# Altium PCB ANT-F-2.4G-FR4.PcbDoc (part 1 of 2)
Units mil, origin at the board's own origin, x right, y up, seen from the top; angles counter-clockwise.
Board outline 8878.9 x 2863.35 mil, 2 copper layers (Top Layer, Bottom Layer); 99 components, 48 nets, 825 pads, 1430 vias.
Unrouted connection lines stored in the file: 96.
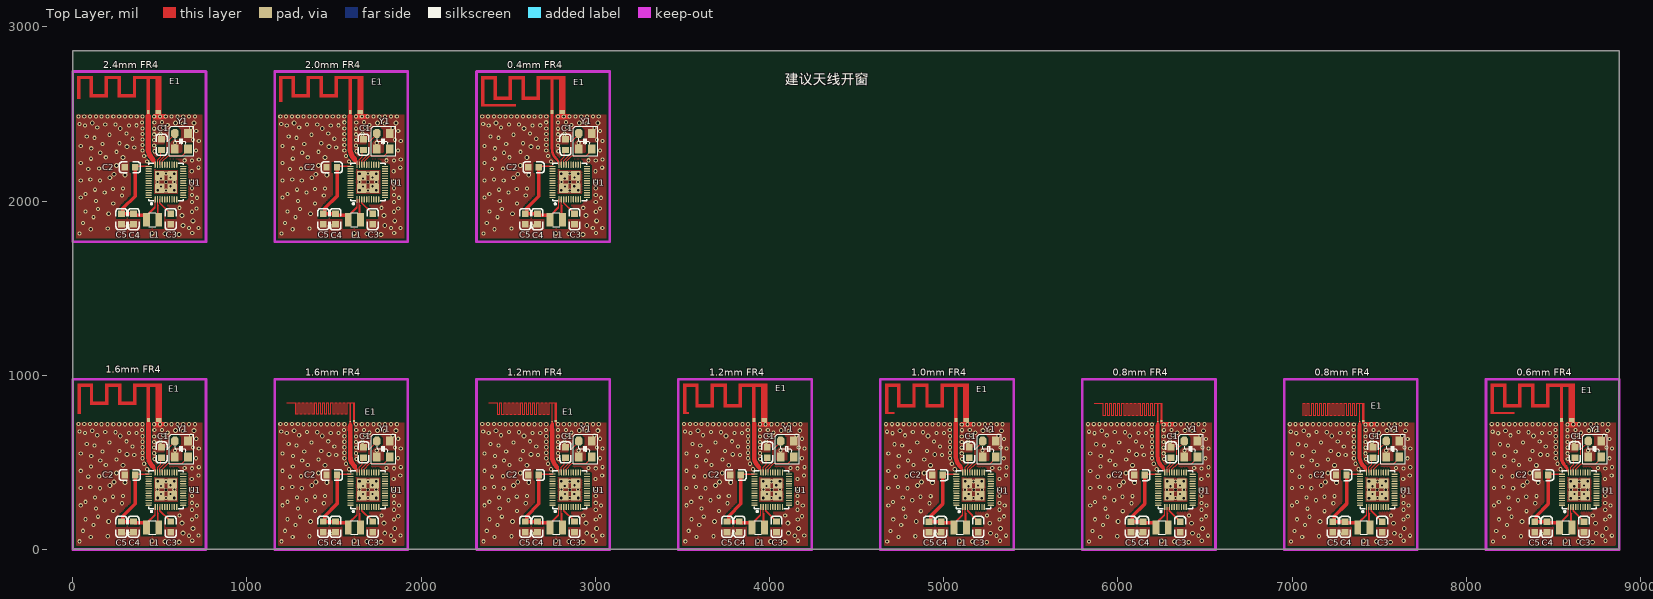
[diagram p0: Top Layer view]
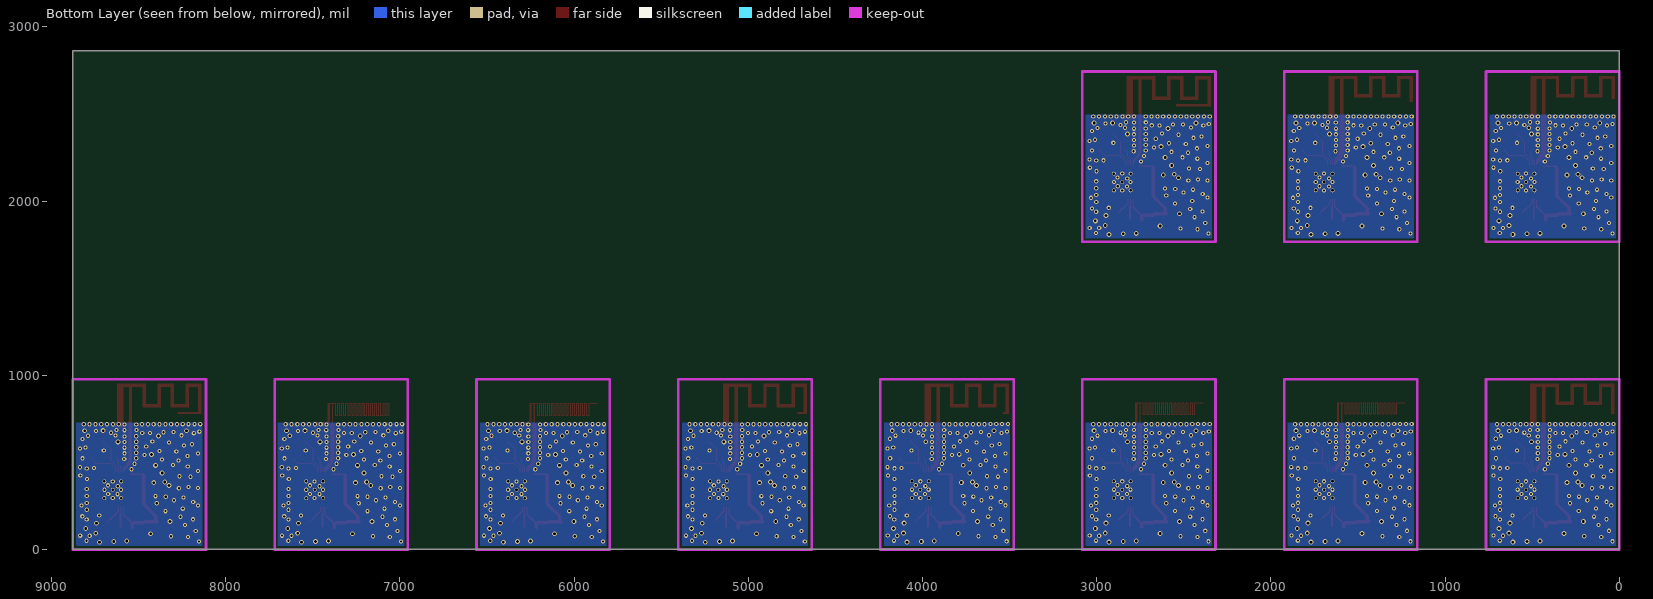
[diagram p1: Bottom Layer view, seen from below]

## Layer stack, top to bottom
Top Solder: solder mask 0.4, Solder Resist, Dk 3.5
Top Layer: signal copper 1.4
Dielectric 1: dielectric 12.6, FR-4, Dk 4.8
Bottom Layer: signal copper 1.4
Bottom Solder: solder mask 0.4, Solder Resist, Dk 3.5

## Board outline
0,0.33 0,2863.68 8878.9,2863.68 8878.9,0.33

## Design rules (kind name [scope] priority, off if disabled: settings)
Clearance Clearance_2 [InNet('ANT')] p1: gap=6 ignorepadtopadclearanceinfootprint=FALSE
Clearance Clearance_1 [InPolygon] p2: gap=10 ignorepadtopadclearanceinfootprint=FALSE
Clearance [All] p3: gap=6 ignorepadtopadclearanceinfootprint=FALSE except(8: Arc-Via Track-Via SMDPad-Via THPad-Via Via-Via Via-Fill Via-Poly Via-Region Via-Hole)
ComponentClearance [All] p1 off: gap=10 collisioncheckmode=3 verticalgap=10 showdistances=FALSE
DiffPairsRouting [All] p1: maxlimit=10 minlimit=7 mostfreqgap=8 toplayer_minwidth=6 toplayer_maxwidth=15 toplayer_prefwidth=8 bottomlayer_minwidth=6 bottomlayer_maxwidth=15 bottomlayer_prefwidth=8 maxuncoupledlength=500
MinimumSolderMaskSliver [All] p1 off: minsoldermaskwidth=10
PolygonConnect [All] p1: connectstyle=Direct reliefconductorwidth=20 reliefentries=4 polygonreliefangle="90 Angle" airgapwidth=10
RoutingVias [All] p1: holewidth=16 width=28 viastyle="Through Hole" minholewidth=12 minwidth=24 maxholewidth=28 maxwidth=50
SilkToSilkClearance [All] p1 off: silktosilkclearance=10
SilkToSolderMaskClearance [IsPad] p1 off: minsilkscreentomaskgap=10 clearancetoexposedcopper=TRUE
SolderMaskExpansion [All] p1: expansion=4 istentingtop=FALSE
Width [All] p1: maxlimit=100 minlimit=6 preferedwidth=10
25 further rules are at their usual default settings.

## Components (designator, comment, footprint, x,y, rotation, side; value= is the part's Value field where it differs from the comment)
C1 "2.2uF" 0603_C 2828.57,2293.72 r90 top
C1 "2.2uF" 0603_C 1669.49,2293.72 r90 top
C1 "2.2uF" 0603_C 510.42,2293.72 r90 top
C1 "2.2uF" 0603_C 8623.94,527.08 r90 top
C1 "2.2uF" 0603_C 7464.87,527.08 r90 top
C1 "2.2uF" 0603_C 6305.79,527.08 r90 top
C1 "2.2uF" 0603_C 5146.72,527.08 r90 top
C1 "2.2uF" 0603_C 3987.64,527.41 r90 top
C1 "2.2uF" 0603_C 2828.57,527.41 r90 top
C1 "2.2uF" 0603_C 1669.49,527.41 r90 top
C1 "2.2uF" 0603_C 510.42,527.41 r90 top
C2 "0.1uF" 0603_C 2676.6,2193.87 r180 top
C2 "0.1uF" 0603_C 1517.53,2193.87 r180 top
C2 "0.1uF" 0603_C 358.45,2193.87 r180 top
C2 "0.1uF" 0603_C 8471.98,427.24 r180 top
C2 "0.1uF" 0603_C 7312.9,427.24 r180 top
C2 "0.1uF" 0603_C 6153.83,427.24 r180 top
C2 "0.1uF" 0603_C 4994.75,427.24 r180 top
C2 "0.1uF" 0603_C 3835.68,427.57 r180 top
C2 "0.1uF" 0603_C 2676.6,427.57 r180 top
C2 "0.1uF" 0603_C 1517.53,427.57 r180 top
C2 "0.1uF" 0603_C 358.45,427.57 r180 top
C3 "2.2uF" 0603_C 2881,1866.22 r90 top
C3 "2.2uF" 0603_C 1721.92,1866.22 r90 top
C3 "2.2uF" 0603_C 562.85,1866.22 r90 top
C3 "2.2uF" 0603_C 8676.37,99.58 r90 top
C3 "2.2uF" 0603_C 7517.3,99.58 r90 top
C3 "2.2uF" 0603_C 6358.22,99.58 r90 top
C3 "2.2uF" 0603_C 5199.15,99.58 r90 top
C3 "2.2uF" 0603_C 4040.07,99.91 r90 top
C3 "2.2uF" 0603_C 2881,99.91 r90 top
C3 "2.2uF" 0603_C 1721.92,99.91 r90 top
C3 "2.2uF" 0603_C 562.85,99.91 r90 top
C4 "2.2uF" 0603_C 2667.8,1866.22 r90 top
C4 "2.2uF" 0603_C 1508.73,1866.22 r90 top
C4 "2.2uF" 0603_C 349.65,1866.22 r90 top
C4 "2.2uF" 0603_C 8463.18,99.58 r90 top
C4 "2.2uF" 0603_C 7304.1,99.58 r90 top
C4 "2.2uF" 0603_C 6145.03,99.58 r90 top
C4 "2.2uF" 0603_C 4985.95,99.58 r90 top
C4 "2.2uF" 0603_C 3826.88,99.91 r90 top
C4 "2.2uF" 0603_C 2667.8,99.91 r90 top
C4 "2.2uF" 0603_C 1508.73,99.91 r90 top
C4 "2.2uF" 0603_C 349.65,99.91 r90 top
C5 "2.2uF" 0603_C 2597.79,1866.22 r90 top
C5 "2.2uF" 0603_C 1438.72,1866.22 r90 top
C5 "2.2uF" 0603_C 279.64,1866.22 r90 top
C5 "2.2uF" 0603_C 8393.17,99.58 r90 top
C5 "2.2uF" 0603_C 7234.1,99.58 r90 top
C5 "2.2uF" 0603_C 6075.02,99.58 r90 top
C5 "2.2uF" 0603_C 4915.94,99.58 r90 top
C5 "2.2uF" 0603_C 3756.87,99.91 r90 top
C5 "2.2uF" 0603_C 2597.79,99.91 r90 top
C5 "2.2uF" 0603_C 1438.72,99.91 r90 top
C5 "2.2uF" 0603_C 279.64,99.91 r90 top
E1 "" ANT-F-3-2.4G-1.6mmFR4 1593.52,735.55 r180 top
E1 "" ANT-F-2-2.4G-1.2mmFR4 2752.45,735.55 r180 top
E1 "" ANT-F-2-2.4G-0.8mmFR4 7388.14,735.22 r180 top
E1 "" ANT-F-1-2.4G-2.4mmFR4 433.85,2510.87 r0 top
E1 "" ANT-F-1-2.4G-2.0mmFR4 1592.92,2510.87 r0 top
E1 "" ANT-F-1-2.4G-1.2mmFR4 3911.28,744.41 r0 top
E1 "" ANT-F-1-2.4G-1.0mmFR4 5070.36,744.08 r0 top
E1 "" ANT-F-1-2.4G-0.6mmFR4 8547.39,744.08 r0 top
E1 "" ANT-F-1-2.4G-0.4mmFR4 2752.01,2510.72 r0 top
E1 "ANTENNA" ANT-F-1-2.4G-1.6mmFR4 435.07,744.57 r0 top
L1 "22uH" SMD_2x2mm 2776.55,1892.87 r180 top
L1 "22uH" SMD_2x2mm 1617.47,1892.87 r180 top
L1 "22uH" SMD_2x2mm 458.4,1892.87 r180 top
L1 "22uH" SMD_2x2mm 8571.92,126.23 r180 top
L1 "22uH" SMD_2x2mm 7412.85,126.23 r180 top
L1 "22uH" SMD_2x2mm 6253.77,126.23 r180 top
L1 "22uH" SMD_2x2mm 5094.7,126.23 r180 top
L1 "22uH" SMD_2x2mm 3935.62,126.56 r180 top
L1 "22uH" SMD_2x2mm 2776.55,126.56 r180 top
L1 "22uH" SMD_2x2mm 1617.47,126.56 r180 top
L1 "22uH" SMD_2x2mm 458.4,126.56 r180 top
U1 "CH582M" QFN48_5X5 2853.61,2109.71 r0 top
U1 "CH582M" QFN48_5X5 1694.53,2109.71 r0 top
U1 "CH582M" QFN48_5X5 535.46,2109.71 r0 top
U1 "CH582M" QFN48_5X5 8648.98,343.08 r0 top
U1 "CH582M" QFN48_5X5 7489.91,343.08 r0 top
U1 "CH582M" QFN48_5X5 6330.83,343.08 r0 top
U1 "CH582M" QFN48_5X5 5171.76,343.08 r0 top
U1 "CH582M" QFN48_5X5 4012.68,343.41 r0 top
U1 "CH582M" QFN48_5X5 2853.61,343.41 r0 top
U1 "CH582M" QFN48_5X5 1694.53,343.41 r0 top
U1 "CH582M" QFN48_5X5 535.46,343.41 r0 top
Y1 "32M" XT3225 2905.26,2388.63 r270 top
Y1 "32M" XT3225 1746.18,2388.63 r270 top
Y1 "32M" XT3225 587.11,2388.63 r270 top
Y1 "32M" XT3225 8700.64,621.99 r270 top
Y1 "32M" XT3225 7541.56,621.99 r270 top
Y1 "32M" XT3225 6382.48,621.99 r270 top
Y1 "32M" XT3225 5223.41,621.99 r270 top
Y1 "32M" XT3225 4064.33,622.33 r270 top
Y1 "32M" XT3225 2905.26,622.33 r270 top
Y1 "32M" XT3225 1746.18,622.33 r270 top
Y1 "32M" XT3225 587.11,622.33 r270 top
? "" ANT-F-1-2.4G-0.8mmFR4 6229.07,735.22 r180 top

## Footprints (in the part's own frame and the unit in brackets; to place one, negate y for a bottom-side part, rotate by r counter-clockwise, add the part's x,y. Pads: shape width x height; smd on the part's side, far side on the other; paste and mask are expansions set on the pad)
0603_C [mm]
  rect 0.93x0.98 smd: 1(0,0) 2(1.54,0)
  silkscreen extent -0.76,-0.79 2.31,0.79
ANT-F-1-2.4G-0.4mmFR4 [mm]
  rect 0.8x0.6 smd mask+0: 0(1.483,0)
  rect 0.4x0.6 smd mask+0: 1(0,0)
  Top Layer region: -9.86,4.98 -10.36,4.98 -10.36,0.86 -9.86,0.86
  Top Layer region: -8.06,5.3 -10.36,5.3 -10.36,4.8 -8.06,4.8
  Top Layer region: -8.06,4.98 -8.56,4.98 -8.56,1.8 -8.06,1.8
  Top Layer region: -5.875,2.3 -8.364,2.3 -8.364,1.8 -5.875,1.8
  Top Layer region: -5.86,4.98 -6.36,4.98 -6.36,1.8 -5.86,1.8
  Top Layer region: -3.96,5.3 -6.36,5.3 -6.36,4.8 -3.96,4.8
  Top Layer region: -3.96,4.98 -4.46,4.98 -4.46,1.8 -3.96,1.8
  Top Layer region: -1.85,2.3 -4.39,2.3 -4.39,1.8 -1.85,1.8
  Top Layer region: -1.76,4.98 -2.26,4.98 -2.26,1.8 -1.76,1.8
  Top Layer region: 1.94,5.3 -2.26,5.3 -2.26,4.8 1.94,4.8
  Top Layer region: 1.94,5.005 1.04,5.005 1.04,-0.3 1.94,-0.3
  Top Layer region: 0.24,5.031 -0.26,5.031 -0.26,-0.3 0.24,-0.3
  Top Layer region: -5.26,1.16 -10.36,1.16 -10.36,0.86 -5.26,0.86
ANT-F-1-2.4G-0.6mmFR4 [mm]
  rect 0.8x0.6 smd mask+0: 0(1.483,0)
  rect 0.4x0.6 smd mask+0: 1(0,0)
  Top Layer region: -6.86,1.16 -10.36,1.16 -10.36,0.86 -6.86,0.86
  Top Layer region: 0.24,5.031 -0.26,5.031 -0.26,-0.3 0.24,-0.3
  Top Layer region: 1.94,5.005 1.04,5.005 1.04,-0.3 1.94,-0.3
  Top Layer region: 1.94,5.3 -2.26,5.3 -2.26,4.8 1.94,4.8
  Top Layer region: -1.76,4.98 -2.26,4.98 -2.26,1.8 -1.76,1.8
  Top Layer region: -1.85,2.3 -4.39,2.3 -4.39,1.8 -1.85,1.8
  Top Layer region: -3.96,4.98 -4.46,4.98 -4.46,1.8 -3.96,1.8
  Top Layer region: -3.96,5.3 -6.36,5.3 -6.36,4.8 -3.96,4.8
  Top Layer region: -5.86,4.98 -6.36,4.98 -6.36,1.8 -5.86,1.8
  Top Layer region: -5.875,2.3 -8.364,2.3 -8.364,1.8 -5.875,1.8
  Top Layer region: -8.06,4.98 -8.56,4.98 -8.56,1.8 -8.06,1.8
  Top Layer region: -8.06,5.3 -10.36,5.3 -10.36,4.8 -8.06,4.8
  Top Layer region: -9.86,4.98 -10.36,4.98 -10.36,0.86 -9.86,0.86
ANT-F-1-2.4G-0.8mmFR4 [mm]
  rect 0.3x0.3 smd mask+0: 0(-0.525,-0.075)
  rect 0.15x0.15 smd mask+0: 1(0,0)
  Top Layer region: 7.875,-2.725 8.025,-2.725 8.025,-0.825 7.875,-0.825
  Top Layer region: 7.875,-2.725 9.275,-2.725 9.275,-2.575 7.875,-2.575
  Top Layer region: 7.575,-0.975 8.025,-0.975 8.025,-0.825 7.575,-0.825
  Top Layer region: 6.675,-2.725 6.825,-2.725 6.825,-0.825 6.675,-0.825
  Top Layer region: 6.975,-2.725 7.125,-2.725 7.125,-0.825 6.975,-0.825
  Top Layer region: 7.275,-2.725 7.425,-2.725 7.425,-0.825 7.275,-0.825
  Top Layer region: 7.575,-2.725 7.725,-2.725 7.725,-0.825 7.575,-0.825
  Top Layer region: 6.675,-2.725 7.125,-2.725 7.125,-2.575 6.675,-2.575
  Top Layer region: 7.275,-2.725 7.725,-2.725 7.725,-2.575 7.275,-2.575
  Top Layer region: 6.375,-0.975 6.825,-0.975 6.825,-0.825 6.375,-0.825
  Top Layer region: 6.975,-0.975 7.425,-0.975 7.425,-0.825 6.975,-0.825
  Top Layer region: 5.475,-2.725 5.625,-2.725 5.625,-0.825 5.475,-0.825
  Top Layer region: 5.775,-2.725 5.925,-2.725 5.925,-0.825 5.775,-0.825
  Top Layer region: 6.075,-2.725 6.225,-2.725 6.225,-0.825 6.075,-0.825
  Top Layer region: 6.375,-2.725 6.525,-2.725 6.525,-0.825 6.375,-0.825
  Top Layer region: 5.475,-2.725 5.925,-2.725 5.925,-2.575 5.475,-2.575
  Top Layer region: 6.075,-2.725 6.525,-2.725 6.525,-2.575 6.075,-2.575
  Top Layer region: 5.175,-0.975 5.625,-0.975 5.625,-0.825 5.175,-0.825
  Top Layer region: 5.775,-0.975 6.225,-0.975 6.225,-0.825 5.775,-0.825
  Top Layer region: 4.275,-2.725 4.425,-2.725 4.425,-0.825 4.275,-0.825
  Top Layer region: 4.575,-2.725 4.725,-2.725 4.725,-0.825 4.575,-0.825
  Top Layer region: 4.875,-2.725 5.025,-2.725 5.025,-0.825 4.875,-0.825
  Top Layer region: 5.175,-2.725 5.325,-2.725 5.325,-0.825 5.175,-0.825
  Top Layer region: 4.275,-2.725 4.725,-2.725 4.725,-2.575 4.275,-2.575
  Top Layer region: 4.875,-2.725 5.325,-2.725 5.325,-2.575 4.875,-2.575
  Top Layer region: 3.975,-0.975 4.425,-0.975 4.425,-0.825 3.975,-0.825
  Top Layer region: 4.575,-0.975 5.025,-0.975 5.025,-0.825 4.575,-0.825
  Top Layer region: 3.075,-2.725 3.225,-2.725 3.225,-0.825 3.075,-0.825
  Top Layer region: 3.375,-2.725 3.525,-2.725 3.525,-0.825 3.375,-0.825
  Top Layer region: 3.675,-2.725 3.825,-2.725 3.825,-0.825 3.675,-0.825
  Top Layer region: 3.975,-2.725 4.125,-2.725 4.125,-0.825 3.975,-0.825
  Top Layer region: 3.075,-2.725 3.525,-2.725 3.525,-2.575 3.075,-2.575
  Top Layer region: 3.675,-2.725 4.125,-2.725 4.125,-2.575 3.675,-2.575
  Top Layer region: 2.775,-0.975 3.225,-0.975 3.225,-0.825 2.775,-0.825
  Top Layer region: 3.375,-0.975 3.825,-0.975 3.825,-0.825 3.375,-0.825
  Top Layer region: 1.875,-2.725 2.025,-2.725 2.025,-0.825 1.875,-0.825
  Top Layer region: 2.175,-2.725 2.325,-2.725 2.325,-0.825 2.175,-0.825
  Top Layer region: 2.475,-2.725 2.625,-2.725 2.625,-0.825 2.475,-0.825
  Top Layer region: 2.775,-2.725 2.925,-2.725 2.925,-0.825 2.775,-0.825
  Top Layer region: 1.875,-2.725 2.325,-2.725 2.325,-2.575 1.875,-2.575
  Top Layer region: 2.475,-2.725 2.925,-2.725 2.925,-2.575 2.475,-2.575
  Top Layer region: 1.575,-0.975 2.025,-0.975 2.025,-0.825 1.575,-0.825
  Top Layer region: 2.175,-0.975 2.625,-0.975 2.625,-0.825 2.175,-0.825
  Top Layer region: 0.975,-0.975 1.425,-0.975 1.425,-0.825 0.975,-0.825
  Top Layer region: 0.375,-0.975 0.825,-0.975 0.825,-0.825 0.375,-0.825
  Top Layer region: 1.275,-2.725 1.725,-2.725 1.725,-2.575 1.275,-2.575
  Top Layer region: 0.675,-2.725 1.125,-2.725 1.125,-2.575 0.675,-2.575
  Top Layer region: 0.075,-2.725 0.525,-2.725 0.525,-2.575 0.075,-2.575
  Top Layer region: 1.575,-2.725 1.725,-2.725 1.725,-0.825 1.575,-0.825
  Top Layer region: 1.275,-2.725 1.425,-2.725 1.425,-0.825 1.275,-0.825
  Top Layer region: 0.975,-2.725 1.125,-2.725 1.125,-0.825 0.975,-0.825
  Top Layer region: 0.675,-2.725 0.825,-2.725 0.825,-0.825 0.675,-0.825
  Top Layer region: 0.375,-2.725 0.525,-2.725 0.525,-0.825 0.375,-0.825
  Top Layer region: -0.675,-2.575 -0.675,-2.725 0.075,-2.725 0.075,-2.575
  Top Layer region: -0.075,-2.725 0.075,-2.725 0.075,0.075 -0.075,0.075
  Top Layer region: -0.675,-2.725 -0.375,-2.725 -0.375,0.075 -0.675,0.075
ANT-F-1-2.4G-1.0mmFR4 [mm]
  rect 0.8x0.6 smd mask+0: 0(1.483,0)
  rect 0.4x0.6 smd mask+0: 1(0,0)
  Top Layer region: -9.86,4.98 -10.36,4.98 -10.36,0.86 -9.86,0.86
  Top Layer region: -8.06,5.3 -10.36,5.3 -10.36,4.8 -8.06,4.8
  Top Layer region: -8.06,4.98 -8.56,4.98 -8.56,1.8 -8.06,1.8
  Top Layer region: -5.875,2.3 -8.364,2.3 -8.364,1.8 -5.875,1.8
  Top Layer region: -5.86,4.98 -6.36,4.98 -6.36,1.8 -5.86,1.8
  Top Layer region: -3.96,5.3 -6.36,5.3 -6.36,4.8 -3.96,4.8
  Top Layer region: -3.96,4.98 -4.46,4.98 -4.46,1.8 -3.96,1.8
  Top Layer region: -1.85,2.3 -4.39,2.3 -4.39,1.8 -1.85,1.8
  Top Layer region: -1.76,4.98 -2.26,4.98 -2.26,1.8 -1.76,1.8
  Top Layer region: 1.94,5.3 -2.26,5.3 -2.26,4.8 1.94,4.8
  Top Layer region: 1.94,5.005 1.04,5.005 1.04,-0.3 1.94,-0.3
  Top Layer region: 0.24,5.031 -0.26,5.031 -0.26,-0.3 0.24,-0.3
  Top Layer region: -8.96,1.16 -10.36,1.16 -10.36,0.86 -8.96,0.86
ANT-F-1-2.4G-1.2mmFR4 [mm]
  rect 0.8x0.6 smd mask+0: 0(1.483,0)
  rect 0.4x0.6 smd mask+0: 1(0,0)
  Top Layer region: -9.46,1.16 -10.36,1.16 -10.36,0.86 -9.46,0.86
  Top Layer region: 0.24,5.031 -0.26,5.031 -0.26,-0.3 0.24,-0.3
  Top Layer region: 1.94,5.005 1.04,5.005 1.04,-0.3 1.94,-0.3
  Top Layer region: 1.94,5.3 -2.26,5.3 -2.26,4.8 1.94,4.8
  Top Layer region: -1.76,4.98 -2.26,4.98 -2.26,1.8 -1.76,1.8
  Top Layer region: -1.85,2.3 -4.39,2.3 -4.39,1.8 -1.85,1.8
  Top Layer region: -3.96,4.98 -4.46,4.98 -4.46,1.8 -3.96,1.8
  Top Layer region: -3.96,5.3 -6.36,5.3 -6.36,4.8 -3.96,4.8
  Top Layer region: -5.86,4.98 -6.36,4.98 -6.36,1.8 -5.86,1.8
  Top Layer region: -5.875,2.3 -8.364,2.3 -8.364,1.8 -5.875,1.8
  Top Layer region: -8.06,4.98 -8.56,4.98 -8.56,1.8 -8.06,1.8
  Top Layer region: -8.06,5.3 -10.36,5.3 -10.36,4.8 -8.06,4.8
  Top Layer region: -9.86,4.98 -10.36,4.98 -10.36,0.86 -9.86,0.86
ANT-F-1-2.4G-1.6mmFR4 [mm]
  rect 0.8x0.6 smd mask+0: 0(1.483,0)
  rect 0.4x0.6 smd mask+0: 1(0,0)
  Top Layer region: 0.24,5.027 -0.26,5.027 -0.26,-0.304 0.24,-0.304
  Top Layer region: 1.94,5.002 1.04,5.002 1.04,-0.304 1.94,-0.304
  Top Layer region: 1.94,5.296 -2.26,5.296 -2.26,4.796 1.94,4.796
  Top Layer region: -1.76,4.977 -2.26,4.977 -2.26,2.157 -1.76,2.157
  Top Layer region: -1.85,2.651 -4.39,2.651 -4.39,2.156 -1.85,2.156
  Top Layer region: -3.96,4.976 -4.46,4.976 -4.46,2.156 -3.96,2.156
  Top Layer region: -3.96,5.296 -6.36,5.296 -6.36,4.796 -3.96,4.796
  Top Layer region: -5.86,4.977 -6.36,4.977 -6.36,2.157 -5.86,2.157
  Top Layer region: -5.875,2.657 -8.364,2.657 -8.364,2.157 -5.875,2.157
  Top Layer region: -8.06,4.977 -8.56,4.977 -8.56,2.157 -8.06,2.157
  Top Layer region: -8.06,5.296 -10.36,5.296 -10.36,4.796 -8.06,4.796
  Top Layer region: -9.86,4.976 -10.36,4.976 -10.36,0.856 -9.86,0.856
ANT-F-1-2.4G-2.0mmFR4 [mm]
  rect 0.8x0.6 smd mask+0: 0(1.483,0)
  rect 0.4x0.6 smd mask+0: 1(0,0)
  Top Layer region: 0.24,5.027 -0.26,5.027 -0.26,-0.304 0.24,-0.304
  Top Layer region: 1.94,5.002 1.04,5.002 1.04,-0.304 1.94,-0.304
  Top Layer region: 1.94,5.296 -2.26,5.296 -2.26,4.796 1.94,4.796
  Top Layer region: -1.76,4.977 -2.26,4.977 -2.26,2.157 -1.76,2.157
  Top Layer region: -1.85,2.651 -4.39,2.651 -4.39,2.156 -1.85,2.156
  Top Layer region: -3.96,4.976 -4.46,4.976 -4.46,2.156 -3.96,2.156
  Top Layer region: -3.96,5.296 -6.36,5.296 -6.36,4.796 -3.96,4.796
  Top Layer region: -5.86,4.977 -6.36,4.977 -6.36,2.157 -5.86,2.157
  Top Layer region: -5.875,2.657 -8.364,2.657 -8.364,2.157 -5.875,2.157
  Top Layer region: -8.06,4.977 -8.56,4.977 -8.56,2.157 -8.06,2.157
  Top Layer region: -8.06,5.296 -10.36,5.296 -10.36,4.796 -8.06,4.796
  Top Layer region: -9.86,4.976 -10.36,4.976 -10.36,1.496 -9.86,1.496
ANT-F-1-2.4G-2.4mmFR4 [mm]
  rect 0.8x0.6 smd mask+0: 0(1.483,0)
  rect 0.4x0.6 smd mask+0: 1(0,0)
  Top Layer region: 0.24,5.027 -0.26,5.027 -0.26,-0.304 0.24,-0.304
  Top Layer region: 1.94,5.002 1.04,5.002 1.04,-0.304 1.94,-0.304
  Top Layer region: 1.94,5.296 -2.26,5.296 -2.26,4.796 1.94,4.796
  Top Layer region: -1.76,4.977 -2.26,4.977 -2.26,2.157 -1.76,2.157
  Top Layer region: -1.85,2.651 -4.39,2.651 -4.39,2.156 -1.85,2.156
  Top Layer region: -3.96,4.976 -4.46,4.976 -4.46,2.156 -3.96,2.156
  Top Layer region: -3.96,5.296 -6.36,5.296 -6.36,4.796 -3.96,4.796
  Top Layer region: -5.86,4.977 -6.36,4.977 -6.36,2.157 -5.86,2.157
  Top Layer region: -5.875,2.657 -8.364,2.657 -8.364,2.157 -5.875,2.157
  Top Layer region: -8.06,4.977 -8.56,4.977 -8.56,2.157 -8.06,2.157
  Top Layer region: -8.06,5.296 -10.36,5.296 -10.36,4.796 -8.06,4.796
  Top Layer region: -9.86,4.976 -10.36,4.976 -10.36,1.896 -9.86,1.896
ANT-F-2-2.4G-0.8mmFR4 [mm]
  rect 0.3x0.3 smd mask+0: 0(-0.525,-0.075)
  rect 0.15x0.15 smd mask+0: 1(0,0)
  Top Layer region: 7.875,-2.725 8.325,-2.725 8.325,-2.575 7.875,-2.575
  Top Layer region: 8.175,-2.725 8.325,-2.725 8.325,-0.825 8.175,-0.825
  Top Layer region: -0.675,-2.725 -0.375,-2.725 -0.375,0.075 -0.675,0.075
  Top Layer region: -0.075,-2.725 0.075,-2.725 0.075,0.075 -0.075,0.075
  Top Layer region: -0.675,-2.575 -0.675,-2.725 0.075,-2.725 0.075,-2.575
  Top Layer region: 0.375,-2.725 0.525,-2.725 0.525,-0.825 0.375,-0.825
  Top Layer region: 0.675,-2.725 0.825,-2.725 0.825,-0.825 0.675,-0.825
  Top Layer region: 0.975,-2.725 1.125,-2.725 1.125,-0.825 0.975,-0.825
  Top Layer region: 1.275,-2.725 1.425,-2.725 1.425,-0.825 1.275,-0.825
  Top Layer region: 1.575,-2.725 1.725,-2.725 1.725,-0.825 1.575,-0.825
  Top Layer region: -0.075,-2.725 0.525,-2.725 0.525,-2.575 -0.075,-2.575
  Top Layer region: 0.675,-2.725 1.125,-2.725 1.125,-2.575 0.675,-2.575
  Top Layer region: 1.275,-2.725 1.725,-2.725 1.725,-2.575 1.275,-2.575
  Top Layer region: 0.375,-0.975 0.825,-0.975 0.825,-0.825 0.375,-0.825
  Top Layer region: 0.975,-0.975 1.425,-0.975 1.425,-0.825 0.975,-0.825
  Top Layer region: 2.175,-0.975 2.625,-0.975 2.625,-0.825 2.175,-0.825
  Top Layer region: 1.575,-0.975 2.025,-0.975 2.025,-0.825 1.575,-0.825
  Top Layer region: 2.475,-2.725 2.925,-2.725 2.925,-2.575 2.475,-2.575
  Top Layer region: 1.875,-2.725 2.325,-2.725 2.325,-2.575 1.875,-2.575
  Top Layer region: 2.775,-2.725 2.925,-2.725 2.925,-0.825 2.775,-0.825
  Top Layer region: 2.475,-2.725 2.625,-2.725 2.625,-0.825 2.475,-0.825
  Top Layer region: 2.175,-2.725 2.325,-2.725 2.325,-0.825 2.175,-0.825
  Top Layer region: 1.875,-2.725 2.025,-2.725 2.025,-0.825 1.875,-0.825
  Top Layer region: 3.375,-0.975 3.825,-0.975 3.825,-0.825 3.375,-0.825
  Top Layer region: 2.775,-0.975 3.225,-0.975 3.225,-0.825 2.775,-0.825
  Top Layer region: 3.675,-2.725 4.125,-2.725 4.125,-2.575 3.675,-2.575
  Top Layer region: 3.075,-2.725 3.525,-2.725 3.525,-2.575 3.075,-2.575
  Top Layer region: 3.975,-2.725 4.125,-2.725 4.125,-0.825 3.975,-0.825
  Top Layer region: 3.675,-2.725 3.825,-2.725 3.825,-0.825 3.675,-0.825
  Top Layer region: 3.375,-2.725 3.525,-2.725 3.525,-0.825 3.375,-0.825
  Top Layer region: 3.075,-2.725 3.225,-2.725 3.225,-0.825 3.075,-0.825
  Top Layer region: 4.575,-0.975 5.025,-0.975 5.025,-0.825 4.575,-0.825
  Top Layer region: 3.975,-0.975 4.425,-0.975 4.425,-0.825 3.975,-0.825
  Top Layer region: 4.875,-2.725 5.325,-2.725 5.325,-2.575 4.875,-2.575
  Top Layer region: 4.275,-2.725 4.725,-2.725 4.725,-2.575 4.275,-2.575
  Top Layer region: 5.175,-2.725 5.325,-2.725 5.325,-0.825 5.175,-0.825
  Top Layer region: 4.875,-2.725 5.025,-2.725 5.025,-0.825 4.875,-0.825
  Top Layer region: 4.575,-2.725 4.725,-2.725 4.725,-0.825 4.575,-0.825
  Top Layer region: 4.275,-2.725 4.425,-2.725 4.425,-0.825 4.275,-0.825
  Top Layer region: 5.775,-0.975 6.225,-0.975 6.225,-0.825 5.775,-0.825
  Top Layer region: 5.175,-0.975 5.625,-0.975 5.625,-0.825 5.175,-0.825
  Top Layer region: 6.075,-2.725 6.525,-2.725 6.525,-2.575 6.075,-2.575
  Top Layer region: 5.475,-2.725 5.925,-2.725 5.925,-2.575 5.475,-2.575
  Top Layer region: 6.375,-2.725 6.525,-2.725 6.525,-0.825 6.375,-0.825
  Top Layer region: 6.075,-2.725 6.225,-2.725 6.225,-0.825 6.075,-0.825
  Top Layer region: 5.775,-2.725 5.925,-2.725 5.925,-0.825 5.775,-0.825
  Top Layer region: 5.475,-2.725 5.625,-2.725 5.625,-0.825 5.475,-0.825
  Top Layer region: 6.975,-0.975 7.425,-0.975 7.425,-0.825 6.975,-0.825
  Top Layer region: 6.375,-0.975 6.825,-0.975 6.825,-0.825 6.375,-0.825
  Top Layer region: 7.275,-2.725 7.725,-2.725 7.725,-2.575 7.275,-2.575
  Top Layer region: 6.675,-2.725 7.125,-2.725 7.125,-2.575 6.675,-2.575
  Top Layer region: 7.575,-2.725 7.725,-2.725 7.725,-0.825 7.575,-0.825
  Top Layer region: 7.275,-2.725 7.425,-2.725 7.425,-0.825 7.275,-0.825
  Top Layer region: 6.975,-2.725 7.125,-2.725 7.125,-0.825 6.975,-0.825
  Top Layer region: 6.675,-2.725 6.825,-2.725 6.825,-0.825 6.675,-0.825
  Top Layer region: 7.575,-0.975 8.025,-0.975 8.025,-0.825 7.575,-0.825
  Top Layer region: 7.875,-2.725 8.025,-2.725 8.025,-0.825 7.875,-0.825
ANT-F-2-2.4G-1.2mmFR4 [mm]
  rect 0.3x0.3 smd mask+0: 0(-0.525,-0.075)
  rect 0.15x0.15 smd mask+0: 1(0,0)
  Top Layer region: 7.875,-2.725 8.025,-2.725 8.025,-0.925 7.875,-0.925
  Top Layer region: 7.875,-2.725 9.275,-2.725 9.275,-2.575 7.875,-2.575
  Top Layer region: 7.575,-1.075 8.025,-1.075 8.025,-0.925 7.575,-0.925
  Top Layer region: 6.675,-2.725 6.825,-2.725 6.825,-0.925 6.675,-0.925
  Top Layer region: 6.975,-2.725 7.125,-2.725 7.125,-0.925 6.975,-0.925
  Top Layer region: 7.275,-2.725 7.425,-2.725 7.425,-0.925 7.275,-0.925
  Top Layer region: 7.575,-2.725 7.725,-2.725 7.725,-0.925 7.575,-0.925
  Top Layer region: 6.675,-2.725 7.125,-2.725 7.125,-2.575 6.675,-2.575
  Top Layer region: 7.275,-2.725 7.725,-2.725 7.725,-2.575 7.275,-2.575
  Top Layer region: 6.375,-1.075 6.825,-1.075 6.825,-0.925 6.375,-0.925
  Top Layer region: 6.975,-1.075 7.425,-1.075 7.425,-0.925 6.975,-0.925
  Top Layer region: 5.475,-2.725 5.625,-2.725 5.625,-0.925 5.475,-0.925
  Top Layer region: 5.775,-2.725 5.925,-2.725 5.925,-0.925 5.775,-0.925
  Top Layer region: 6.075,-2.725 6.225,-2.725 6.225,-0.925 6.075,-0.925
  Top Layer region: 6.375,-2.725 6.525,-2.725 6.525,-0.925 6.375,-0.925
  Top Layer region: 5.475,-2.725 5.925,-2.725 5.925,-2.575 5.475,-2.575
  Top Layer region: 6.075,-2.725 6.525,-2.725 6.525,-2.575 6.075,-2.575
  Top Layer region: 5.175,-1.075 5.625,-1.075 5.625,-0.925 5.175,-0.925
  Top Layer region: 5.775,-1.075 6.225,-1.075 6.225,-0.925 5.775,-0.925
  Top Layer region: 4.275,-2.725 4.425,-2.725 4.425,-0.925 4.275,-0.925
  Top Layer region: 4.575,-2.725 4.725,-2.725 4.725,-0.925 4.575,-0.925
  Top Layer region: 4.875,-2.725 5.025,-2.725 5.025,-0.925 4.875,-0.925
  Top Layer region: 5.175,-2.725 5.325,-2.725 5.325,-0.925 5.175,-0.925
  Top Layer region: 4.275,-2.725 4.725,-2.725 4.725,-2.575 4.275,-2.575
  Top Layer region: 4.875,-2.725 5.325,-2.725 5.325,-2.575 4.875,-2.575
  Top Layer region: 3.975,-1.075 4.425,-1.075 4.425,-0.925 3.975,-0.925
  Top Layer region: 4.575,-1.075 5.025,-1.075 5.025,-0.925 4.575,-0.925
  Top Layer region: 3.075,-2.725 3.225,-2.725 3.225,-0.925 3.075,-0.925
  Top Layer region: 3.375,-2.725 3.525,-2.725 3.525,-0.925 3.375,-0.925
  Top Layer region: 3.675,-2.725 3.825,-2.725 3.825,-0.925 3.675,-0.925
  Top Layer region: 3.975,-2.725 4.125,-2.725 4.125,-0.925 3.975,-0.925
  Top Layer region: 3.075,-2.725 3.525,-2.725 3.525,-2.575 3.075,-2.575
  Top Layer region: 3.675,-2.725 4.125,-2.725 4.125,-2.575 3.675,-2.575
  Top Layer region: 2.775,-1.075 3.225,-1.075 3.225,-0.925 2.775,-0.925
  Top Layer region: 3.375,-1.075 3.825,-1.075 3.825,-0.925 3.375,-0.925
  Top Layer region: 1.875,-2.725 2.025,-2.725 2.025,-0.925 1.875,-0.925
  Top Layer region: 2.175,-2.725 2.325,-2.725 2.325,-0.925 2.175,-0.925
  Top Layer region: 2.475,-2.725 2.625,-2.725 2.625,-0.925 2.475,-0.925
  Top Layer region: 2.775,-2.725 2.925,-2.725 2.925,-0.925 2.775,-0.925
  Top Layer region: 1.875,-2.725 2.325,-2.725 2.325,-2.575 1.875,-2.575
  Top Layer region: 2.475,-2.725 2.925,-2.725 2.925,-2.575 2.475,-2.575
  Top Layer region: 1.575,-1.075 2.025,-1.075 2.025,-0.925 1.575,-0.925
  Top Layer region: 2.175,-1.075 2.625,-1.075 2.625,-0.925 2.175,-0.925
  Top Layer region: 0.975,-1.075 1.425,-1.075 1.425,-0.925 0.975,-0.925
  Top Layer region: 0.375,-1.075 0.825,-1.075 0.825,-0.925 0.375,-0.925
  Top Layer region: 1.275,-2.725 1.725,-2.725 1.725,-2.575 1.275,-2.575
  Top Layer region: 0.675,-2.725 1.125,-2.725 1.125,-2.575 0.675,-2.575
  Top Layer region: 0.075,-2.725 0.525,-2.725 0.525,-2.575 0.075,-2.575
  Top Layer region: 1.575,-2.725 1.725,-2.725 1.725,-0.925 1.575,-0.925
  Top Layer region: 1.275,-2.725 1.425,-2.725 1.425,-0.925 1.275,-0.925
  Top Layer region: 0.975,-2.725 1.125,-2.725 1.125,-0.925 0.975,-0.925
  Top Layer region: 0.675,-2.725 0.825,-2.725 0.825,-0.925 0.675,-0.925
  Top Layer region: 0.375,-2.725 0.525,-2.725 0.525,-0.925 0.375,-0.925
  Top Layer region: -0.675,-2.575 -0.675,-2.725 0.075,-2.725 0.075,-2.575
  Top Layer region: -0.075,-2.725 0.075,-2.725 0.075,0.075 -0.075,0.075
  Top Layer region: -0.675,-2.725 -0.375,-2.725 -0.375,0.075 -0.675,0.075
ANT-F-3-2.4G-1.6mmFR4 [mm]
  rect 0.3x0.3 smd mask+0: 0(-0.525,-0.075)
  rect 0.15x0.15 smd mask+0: 1(0,0)
  Top Layer region: -0.675,-2.725 -0.375,-2.725 -0.375,0.075 -0.675,0.075
  Top Layer region: -0.075,-2.725 0.075,-2.725 0.075,0.075 -0.075,0.075
  Top Layer region: -0.675,-2.575 -0.675,-2.725 0.075,-2.725 0.075,-2.575
  Top Layer region: 0.375,-2.725 0.525,-2.725 0.525,-1.025 0.375,-1.025
  Top Layer region: 0.675,-2.725 0.825,-2.725 0.825,-1.025 0.675,-1.025
  Top Layer region: 0.975,-2.725 1.125,-2.725 1.125,-1.025 0.975,-1.025
  Top Layer region: 1.275,-2.725 1.425,-2.725 1.425,-1.025 1.275,-1.025
  Top Layer region: 1.575,-2.725 1.725,-2.725 1.725,-1.025 1.575,-1.025
  Top Layer region: 0.075,-2.725 0.525,-2.725 0.525,-2.575 0.075,-2.575
  Top Layer region: 0.675,-2.725 1.125,-2.725 1.125,-2.575 0.675,-2.575
  Top Layer region: 1.275,-2.725 1.725,-2.725 1.725,-2.575 1.275,-2.575
  Top Layer region: 0.375,-1.175 0.825,-1.175 0.825,-1.025 0.375,-1.025
  Top Layer region: 0.975,-1.175 1.425,-1.175 1.425,-1.025 0.975,-1.025
  Top Layer region: 2.175,-1.175 2.625,-1.175 2.625,-1.025 2.175,-1.025
  Top Layer region: 1.575,-1.175 2.025,-1.175 2.025,-1.025 1.575,-1.025
  Top Layer region: 2.475,-2.725 2.925,-2.725 2.925,-2.575 2.475,-2.575
  Top Layer region: 1.875,-2.725 2.325,-2.725 2.325,-2.575 1.875,-2.575
  Top Layer region: 2.775,-2.725 2.925,-2.725 2.925,-1.025 2.775,-1.025
  Top Layer region: 2.475,-2.725 2.625,-2.725 2.625,-1.025 2.475,-1.025
  Top Layer region: 2.175,-2.725 2.325,-2.725 2.325,-1.025 2.175,-1.025
  Top Layer region: 1.875,-2.725 2.025,-2.725 2.025,-1.025 1.875,-1.025
  Top Layer region: 3.375,-1.175 3.825,-1.175 3.825,-1.025 3.375,-1.025
  Top Layer region: 2.775,-1.175 3.225,-1.175 3.225,-1.025 2.775,-1.025
  Top Layer region: 3.675,-2.725 4.125,-2.725 4.125,-2.575 3.675,-2.575
  Top Layer region: 3.075,-2.725 3.525,-2.725 3.525,-2.575 3.075,-2.575
  Top Layer region: 3.975,-2.725 4.125,-2.725 4.125,-1.025 3.975,-1.025
  Top Layer region: 3.675,-2.725 3.825,-2.725 3.825,-1.025 3.675,-1.025
  Top Layer region: 3.375,-2.725 3.525,-2.725 3.525,-1.025 3.375,-1.025
  Top Layer region: 3.075,-2.725 3.225,-2.725 3.225,-1.025 3.075,-1.025
  Top Layer region: 4.575,-1.175 5.025,-1.175 5.025,-1.025 4.575,-1.025
  Top Layer region: 3.975,-1.175 4.425,-1.175 4.425,-1.025 3.975,-1.025
  Top Layer region: 4.875,-2.725 5.325,-2.725 5.325,-2.575 4.875,-2.575
  Top Layer region: 4.275,-2.725 4.725,-2.725 4.725,-2.575 4.275,-2.575
  Top Layer region: 5.175,-2.725 5.325,-2.725 5.325,-1.025 5.175,-1.025
  Top Layer region: 4.875,-2.725 5.025,-2.725 5.025,-1.025 4.875,-1.025
  Top Layer region: 4.575,-2.725 4.725,-2.725 4.725,-1.025 4.575,-1.025
  Top Layer region: 4.275,-2.725 4.425,-2.725 4.425,-1.025 4.275,-1.025
  Top Layer region: 5.775,-1.175 6.225,-1.175 6.225,-1.025 5.775,-1.025
  Top Layer region: 5.175,-1.175 5.625,-1.175 5.625,-1.025 5.175,-1.025
  Top Layer region: 6.075,-2.725 6.525,-2.725 6.525,-2.575 6.075,-2.575
  Top Layer region: 5.475,-2.725 5.925,-2.725 5.925,-2.575 5.475,-2.575
  Top Layer region: 6.375,-2.725 6.525,-2.725 6.525,-1.025 6.375,-1.025
  Top Layer region: 6.075,-2.725 6.225,-2.725 6.225,-1.025 6.075,-1.025
  Top Layer region: 5.775,-2.725 5.925,-2.725 5.925,-1.025 5.775,-1.025
  Top Layer region: 5.475,-2.725 5.625,-2.725 5.625,-1.025 5.475,-1.025
  Top Layer region: 6.975,-1.175 7.425,-1.175 7.425,-1.025 6.975,-1.025
  Top Layer region: 6.375,-1.175 6.825,-1.175 6.825,-1.025 6.375,-1.025
  Top Layer region: 7.275,-2.725 7.725,-2.725 7.725,-2.575 7.275,-2.575
  Top Layer region: 6.675,-2.725 7.125,-2.725 7.125,-2.575 6.675,-2.575
  Top Layer region: 7.575,-2.725 7.725,-2.725 7.725,-1.025 7.575,-1.025
  Top Layer region: 7.275,-2.725 7.425,-2.725 7.425,-1.025 7.275,-1.025
  Top Layer region: 6.975,-2.725 7.125,-2.725 7.125,-1.025 6.975,-1.025
  Top Layer region: 6.675,-2.725 6.825,-2.725 6.825,-1.025 6.675,-1.025
  Top Layer region: 7.575,-1.175 8.025,-1.175 8.025,-1.025 7.575,-1.025
  Top Layer region: 7.875,-2.725 9.275,-2.725 9.275,-2.575 7.875,-2.575
  Top Layer region: 7.875,-2.725 8.025,-2.725 8.025,-1.025 7.875,-1.025
QFN48_5X5 [mm]
  round 0.559 hole 0.381 mask+0.102: 0(-1.219,-1.219) 0(-1.219,1.219) 0(0,0) 0(1.219,-1.219) 0(1.219,1.219)
  rect 1.397x1.397 smd mask+0: 0(-0.901,-0.895) 0(-0.901,0.908) 0(0.902,-0.895) 0(0.902,0.908)
  oval 0.18x0.9 smd mask+0.051: 1(-1.575,-2.519) 2(-1.225,-2.519) 3(-0.875,-2.519) 4(-0.525,-2.519) 5(-0.175,-2.519) 6(0.175,-2.519) 7(0.525,-2.519) 8(0.875,-2.519) 9(1.225,-2.519) 10(1.575,-2.519) 25(1.575,2.519) 26(1.225,2.519) 27(0.875,2.519) 28(0.525,2.519) 29(0.175,2.519) 30(-0.175,2.519) 31(-0.525,2.519) 32(-0.875,2.519) 33(-1.225,2.519) 34(-1.575,2.519)
  oval 0.9x0.18 smd mask+0.051: 11(2.514,-2.275) 12(2.514,-1.925) 13(2.514,-1.575) 14(2.514,-1.225) 15(2.514,-0.875) 16(2.514,-0.525) 17(2.514,-0.175) 18(2.514,0.175) 19(2.514,0.525) 20(2.514,0.875) 21(2.514,1.225) 22(2.514,1.575) 23(2.514,1.925) 24(2.514,2.275) 35(-2.514,2.275) 36(-2.514,1.925) 37(-2.514,1.575) 38(-2.514,1.225) 39(-2.514,0.875) 40(-2.514,0.525) 41(-2.514,0.175) 42(-2.514,-0.175) 43(-2.514,-0.525) 44(-2.514,-0.875) 45(-2.514,-1.225) 46(-2.514,-1.575) 47(-2.514,-1.925) 48(-2.514,-2.275)
  silkscreen extent -2.51,-3.31 2.51,2.77
SMD_2x2mm [mm]
  rect 1x2 smd: 1(-0.905,0) 2(0.905,0)
  silkscreen extent -0.47,-1 0.53,1
XT3225 [mm]
  oct 1.3x1.1 smd: 1(0,0)
  rect 1.3x1.1 smd: 2(2.3,0) 3(2.3,1.9) 4(0,1.9)
  silkscreen extent -1.02,-0.8 3.27,2.74

## Part data
C1 C1 C1 C1 C1 C1 C1 C1 C1 C1 C1 C2 C2 C2 C2 C2 C2 C2 C2 C2 C2 C2 C3 C3 C3 C3 C3 C3 C3 C3 C3 C3 C3 C4 C4 C4 C4 C4 C4 C4 C4 C4 C4 C4 C5 C5 C5 C5 C5 C5 C5 C5 C5 C5 C5: library part CAP, "Capacitor"
E1: "Generic Antenna"
L1 L1 L1 L1 L1 L1 L1 L1 L1 L1 L1: library part INDUCTOR
U1 U1 U1 U1 U1 U1 U1 U1 U1 U1 U1: "RISC-V MCU with BLE/2*USB/ADC/PWM/SPI/I2C/4*UART"
Y1 Y1 Y1 Y1 Y1 Y1 Y1 Y1 Y1 Y1 Y1: library part XTAL, "Crystal Oscillator", LatestRevisionDate=17-Jul-2002, LatestRevisionNote="Re-released for DXP Platform.", PackageDescription="Crystal, Thru-Hole; 2 Leads; Body 3.1 x 8.2 mm (Dia.xH)", PackageReference=R38, Published=8-Jun-2000, Publisher="Altium Limited"

## Via types
v1: diameter 24, hole 12, Top Layer to Bottom Layer, tented both sides, 1221 vias
v2: diameter 28, hole 16, Top Layer to Bottom Layer, tented both sides, 209 vias

## Nets (pads, with @x,y where several pads share a name; then routed paths per layer and width w, separated by ;. In a path a pad name is that pad's centre, name@x,y a point inside that pad or via, vN(x,y) a via of type N, cw(c..) or ccw(c..) an arc to the next point about the centre after c; other vN are vias at no path point)
ANT: ?.1 E1.1@435.07,744.57 E1.1@1592.92,2510.87 E1.1@1593.52,735.55 E1.1@2752.01,2510.72 E1.1@2752.45,735.55 E1.1@3911.28,744.41 E1.1@5070.36,744.08 E1.1@7388.14,735.22 E1.1@8547.39,744.08 U1.34 | length 5709.4
  Top Layer w6: 446.89,474.24 469.83,451.3 cw(c461.11,442.57) U1.34@473.45,442.57 ; 449.25,2234.32 472.57,2211 cw(c470.44,2208.87) U1.34@473.45,2208.87 ; 453.07,477.01 463.5,466.58 cw(c439.49,442.57) U1.34@473.45,442.57 ; 453.5,474.19 465.19,462.51 cw(c445.26,442.57) U1.34@473.45,442.57 ; 455.44,2234.49 468.07,2221.86 cw(c455.09,2208.87) U1.34@473.45,2208.87 ; 458.21,478.37 464.18,472.4 cw(c441.8,450.02) U1.34@473.45,450.02 ; 460.38,2234.01 464.92,2229.48 cw(c444.31,2208.87) U1.34@473.45,2208.87 ; 460.8,2239.42 cw(c430.25,2208.87) U1.34@473.45,2208.87 ; 464.74,487.56 cw(c443.69,466.52) 473.45,466.52 U1.34@473.45,456.85 ; 465.01,477.23 cw(c444.63,456.85) U1.34@473.45,456.85 ; 465.62,2251.24 cw(c446.73,2232.34) 473.45,2232.34 U1.34@473.45,2224.42 ; 468.14,2237.23 cw(c455.33,2224.42) U1.34@473.45,2224.42 ; 1582.63,681.59 1582.63,708.09 cw(c1607.31,708.09) 1589.86,725.54 ccw(c1581.02,734.37) E1.1@1593.52,734.37 ; 1585.76,682.02 ccw(c1582.89,684.89) 1586.95,684.89 1586.95,721.8 ; 1590.74,680.5 1590.74,720.43 cw(c1600.24,720.43) 1593.52,727.15 ; 1593.22,689.69 1593.52,689.99 1593.52,727.15 ; 1594.85,686.23 ccw(c1588.84,692.24) 1597.33,692.24 1597.33,723.75 ; 1598.52,686.45 ccw(c1592.26,692.71) 1601.12,692.71 1601.12,717.37 ; 1604.64,682.92 1604.64,708.7 ccw(c1585.71,708.7) 1599.1,722.09 cw(c1612.56,735.55) E1.1@1593.52,735.55 E1.1@1593.52,734.37 ; 1605.97,474.24 1628.91,451.3 cw(c1620.18,442.57) U1.34@1632.53,442.57 ; 1608.25,2234.78 1631.37,2211.65 cw(c1628.59,2208.87) U1.34@1632.53,2208.87 ; 1612.15,477.01 1622.58,466.58 cw(c1598.57,442.57) U1.34@1632.53,442.57 ; 1612.58,474.19 1624.27,462.51 cw(c1604.33,442.57) U1.34@1632.53,442.57 ; 1614.51,2234.49 1627.15,2221.86 cw(c1614.16,2208.87) U1.34@1632.53,2208.87 ; 1617.29,478.37 1623.26,472.4 cw(c1600.88,450.02) U1.34@1632.53,450.02 ; 1619.46,2234.01 1623.99,2229.48 cw(c1603.39,2208.87) U1.34@1632.53,2208.87 ; 1619.87,2239.42 cw(c1589.33,2208.87) U1.34@1632.53,2208.87 ; 1623.81,487.56 cw(c1602.77,466.52) 1632.53,466.52 U1.34@1632.53,456.85 ; 1624.08,477.23 cw(c1603.7,456.85) U1.34@1632.53,456.85 ; 1624.14,2251.48 cw(c1603.88,2231.23) 1632.53,2231.23 U1.34@1632.53,2224.42 ; 1627.22,2237.23 cw(c1614.4,2224.42) U1.34@1632.53,2224.42 ; 2742.47,679.72 2742.47,709.94 cw(c2764.53,709.94) 2748.94,725.54 ccw(c2740.1,734.37) E1.1@2752.58,733.73 ; 2744.84,682.02 ccw(c2741.97,684.89) 2746.03,684.89 ; 2746.54,688.89 2746.54,712.53 cw(c2757.72,712.53) 2749.81,720.43 ; 2749.81,680.5 2749.81,720.43 ; 2752.3,689.69 2752.6,689.99 2752.6,727.15 ; E1.1@2752.45,735.55 ccw(c2765.17,735.55) E1.1@2752.58,733.73 ; E1.1@2752.6,735.55 E1.1@2752.6,734.37 ; 2753.92,686.23 ccw(c2747.92,692.24) 2756.41,692.24 2756.41,723.75 ; 2757.6,686.45 ccw(c2751.33,692.71) 2760.19,692.71 ; 2758.94,694.5 ccw(c2757.98,695.47) 2759.34,695.47 2759.34,723.28 ; 2762.99,681.61 2762.99,714.48 ccw(c2750.54,714.48) 2759.35,723.28 ; 2768.57,471.65 2787.32,452.9 cw(c2776.99,442.57) U1.34@2791.6,442.57 ; 2771.22,477.01 2781.66,466.58 cw(c2757.64,442.57) U1.34@2791.6,442.57 ; 2771.66,474.19 2783.34,462.51 cw(c2763.41,442.57) U1.34@2791.6,442.57 ; 2774.62,2238.74 2782.49,2230.88 cw(c2760.48,2208.87) U1.34@2791.6,2208.87 U1.34@2791.6,2211.39 ; 2776.36,478.37 2782.33,472.4 cw(c2759.95,450.02) U1.34@2791.6,450.02 ; 2779.79,2239.9 cw(c2751.29,2211.39) U1.34@2791.6,2211.39 ; 2782.5,2243.59 cw(c2760.53,2221.62) 2791.6,2221.62 U1.34@2791.6,2211.39 ; 2782.94,486.27 cw(c2762.03,465.36) 2791.6,465.36 U1.34@2791.6,456.85 ; 2783.16,477.23 cw(c2762.78,456.85) U1.34@2791.6,456.85 ; 3903.92,682.02 ccw(c3901.04,684.89) 3905.1,684.89 ; 3916.67,686.45 ccw(c3910.41,692.71) 3919.27,692.71 ; 3927.64,471.65 3946.4,452.9 cw(c3936.06,442.57) U1.34@3950.68,442.57 ; 3930.3,477.01 3940.73,466.58 cw(c3916.72,442.57) U1.34@3950.68,442.57 ; 3930.73,474.19 3942.42,462.51 cw(c3922.48,442.57) U1.34@3950.68,442.57 ; 3935.44,478.37 3941.41,472.4 cw(c3919.03,450.02) U1.34@3950.68,450.02 ; 3942.02,486.27 cw(c3921.11,465.36) 3950.68,465.36 U1.34@3950.68,456.85 ; 3942.23,477.23 cw(c3921.85,456.85) U1.34@3950.68,456.85 ; 5085.26,473.79 5104.76,454.29 cw(c5092.71,442.24) U1.34@5109.75,442.24 ; 5089.37,476.68 5099.81,466.25 cw(c5075.79,442.24) U1.34@5109.75,442.24 ; 5089.81,473.86 5101.49,462.17 cw(c5081.56,442.24) U1.34@5109.75,442.24 ; 5094.51,478.04 5100.48,472.07 cw(c5078.1,449.69) U1.34@5109.75,449.69 ; 5100.96,484.89 cw(c5079.73,463.66) 5109.75,463.66 U1.34@5109.75,456.52 ; 5101.31,476.9 cw(c5080.93,456.52) U1.34@5109.75,456.52 ; 6220.39,694.72 6220.39,713.68 cw(c6235.81,713.68) 6224.91,724.58 ccw(c6214.86,734.63) ?.1@6229.07,734.63 ; 6225.28,706.77 6225.63,707.12 6225.63,723.23 ; 6229.42,706.25 6229.07,706.6 ?.1@6229.07,734.63 ; 6232.65,723.3 6232.65,707.17 ccw(c6235.97,707.17) 6233.62,704.83 ; 6237.51,696.42 6237.51,714.85 ccw(c6225.3,714.85) 6233.93,723.48 cw(c6245.67,735.22) ?.1@6229.07,735.22 ?.1@6229.07,734.63 ; 6248.27,468.78 6264.59,452.46 cw(c6254.37,442.24) U1.34@6268.83,442.24 ; 6255.76,467.38 6260.29,462.84 cw(c6239.69,442.24) U1.34@6268.83,442.24 ; 6256.17,472.78 cw(c6225.63,442.24) U1.34@6268.83,442.24 ; 6261.76,479.17 cw(c6244.71,462.12) 6268.83,462.12 U1.34@6268.83,457.04 ; 6263.39,470.16 cw(c6250.27,457.04) U1.34@6268.83,457.04 ; 7379.47,694.72 7379.47,713.68 cw(c7394.88,713.68) 7383.98,724.58 ccw(c7373.93,734.63) E1.1@7388.14,734.63 ; 7384.36,706.77 7384.71,707.12 7384.71,723.23 ; 7388.5,706.25 7388.14,706.6 E1.1@7388.14,734.63 ; 7391.72,723.3 7391.72,707.17 ccw(c7395.04,707.17) 7392.69,704.83 ; 7396.58,696.42 7396.58,714.85 ccw(c7384.37,714.85) 7393.01,723.48 cw(c7404.75,735.22) E1.1@7388.14,735.22 E1.1@7388.14,734.63 ; 7407.34,468.78 7423.67,452.46 cw(c7413.45,442.24) U1.34@7427.9,442.24 ; 7414.83,467.38 7419.37,462.84 cw(c7398.76,442.24) U1.34@7427.9,442.24 ; 7415.25,472.78 cw(c7384.7,442.24) U1.34@7427.9,442.24 ; 7420.84,479.17 cw(c7403.79,462.12) 7427.9,462.12 U1.34@7427.9,457.04 ; 7422.47,470.16 cw(c7409.35,457.04) U1.34@7427.9,457.04 ; 8565.48,471.7 8581.35,455.82 cw(c8567.77,442.24) U1.34@8586.98,442.24 ; 8573.91,467.38 8578.44,462.84 cw(c8557.84,442.24) U1.34@8586.98,442.24 ; 8574.32,472.78 cw(c8543.78,442.24) U1.34@8586.98,442.24 ; 8576.19,480.81 cw(c8550.15,454.77) 8586.16,462.48 ; 8581.54,470.16 cw(c8568.43,457.04) 8586.16,462.48 ; U1.34@473.45,442.57 U1.34@473.45,450.02 ; U1.34@473.45,450.02 U1.34@473.45,456.85 ; U1.34@473.45,2208.87 U1.34@473.45,2224.42 ; 1593.52,727.15 E1.1@1593.52,734.37 ; U1.34@1632.53,442.57 U1.34@1632.53,450.02 ; U1.34@1632.53,450.02 U1.34@1632.53,456.85 ; U1.34@1632.53,2208.87 U1.34@1632.53,2224.42 ; 2749.81,720.43 cw(c2759.31,720.43) 2752.6,727.15 ; 2752.6,727.15 E1.1@2752.6,733.62 ; E1.1@2752.6,733.62 ccw(c2765.17,735.55) 2756.17,726.56 cw(c2751.92,722.32) 2756.26,726.47 2759.34,723.28 ; E1.1@2752.6,733.62 cw(c2765.17,735.55) E1.1@2752.58,733.73 ; E1.1@2752.6,733.62 E1.1@2752.6,734.37 ; E1.1@2752.58,733.73 ccw(c2740.1,734.37) E1.1@2752.6,734.37 ; U1.34@2791.6,442.57 U1.34@2791.6,450.02 ; U1.34@2791.6,450.02 U1.34@2791.6,456.85 ; U1.34@3950.68,442.57 U1.34@3950.68,450.02 ; U1.34@3950.68,450.02 U1.34@3950.68,456.85 ; U1.34@5109.75,442.24 U1.34@5109.75,449.69 ; U1.34@5109.75,449.69 U1.34@5109.75,456.52 ; U1.34@6268.83,442.24 U1.34@6268.83,457.04 ; U1.34@7427.9,442.24 U1.34@7427.9,457.04 ; 8586.16,462.48 cw(c8550.15,454.77) U1.34@8586.98,454.77 ; 8586.16,462.48 cw(c8568.43,457.04) 8586.98,457.04 U1.34@8586.98,454.77 ; U1.34@8586.98,442.24 U1.34@8586.98,454.77
  Top Layer w15: E1.1@2751.74,2502.46 2751.74,2301.72 ccw(c2833.24,2301.72) 2775.61,2244.08 2779.79,2239.9
  Top Layer w20: E1.1@8547.11,732.62 8547.11,535.08 ccw(c8631.81,535.08) 8571.92,475.19
  Top Layer w23: 6228.96,705.08 6228.96,535.08 ccw(c6313.66,535.08) 6253.77,475.19 6256.17,472.78 ; 7388.04,705.08 7388.04,535.08 ccw(c7472.74,535.08) 7412.84,475.19 7415.25,472.78
  Top Layer w25: 5069.89,725.92 5069.89,535.08 ccw(c5148.14,535.08) 5092.8,479.75 5094.51,478.04
  Top Layer w26.5: 2752.74,689.03 2752.74,535.41 ccw(c2833.4,535.41) 2776.36,478.37 ; 3911.81,724.23 3911.81,535.41 ccw(c3992.47,535.41) 3935.44,478.37
  Top Layer w28: 434.58,723.41 434.58,535.41 ccw(c515.25,535.41) 458.21,478.37 ; 1593.66,689.03 1593.66,535.41 ccw(c1674.32,535.41) 1617.29,478.37
  Top Layer w29: 1592.66,2488.35 1592.66,2301.72 ccw(c1677.36,2301.72) 1617.47,2241.82
  Top Layer w29.5: 433.58,2488.35 433.58,2301.72 ccw(c518.28,2301.72) 458.39,2241.82